# Altium PCB PCB1.PcbDoc
Units mm, origin at the board's own origin, x right, y up, seen from the top; angles counter-clockwise.
Board outline 152.4 x 101.6 mm, 2 copper layers (Top Layer, Bottom Layer); 37 components, 32 nets, 130 pads, 0 vias.
Unrouted connection lines stored in the file: 92.
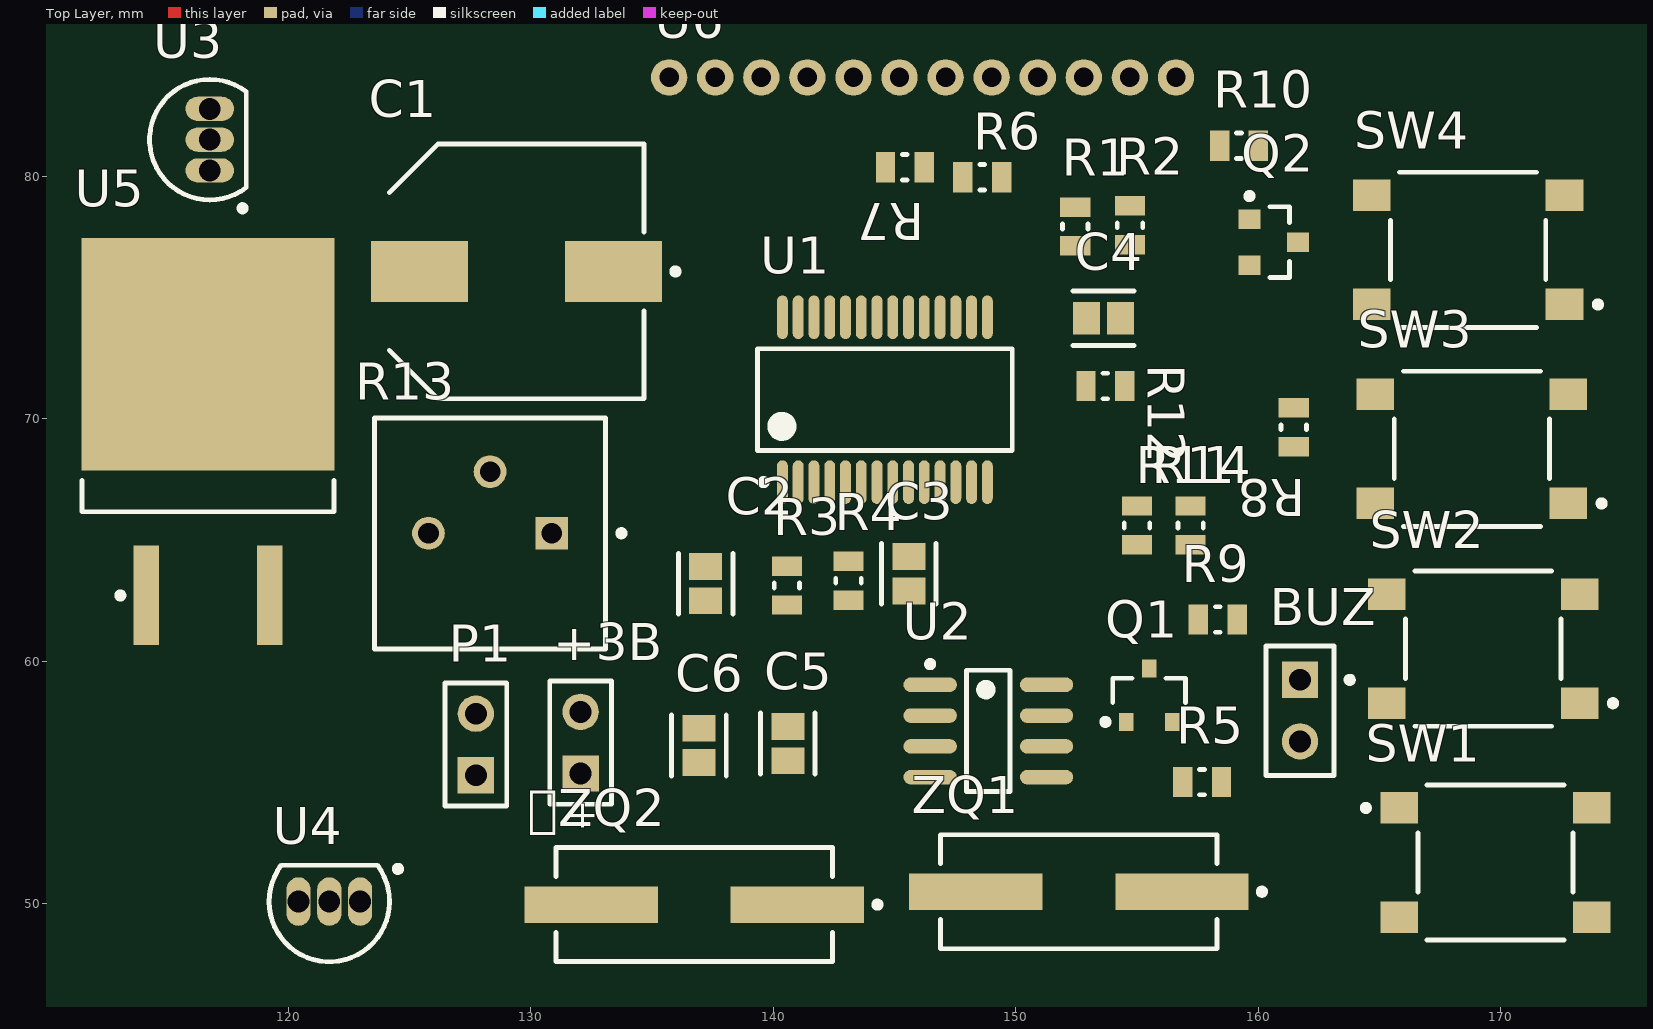
[diagram p0: Top Layer view]
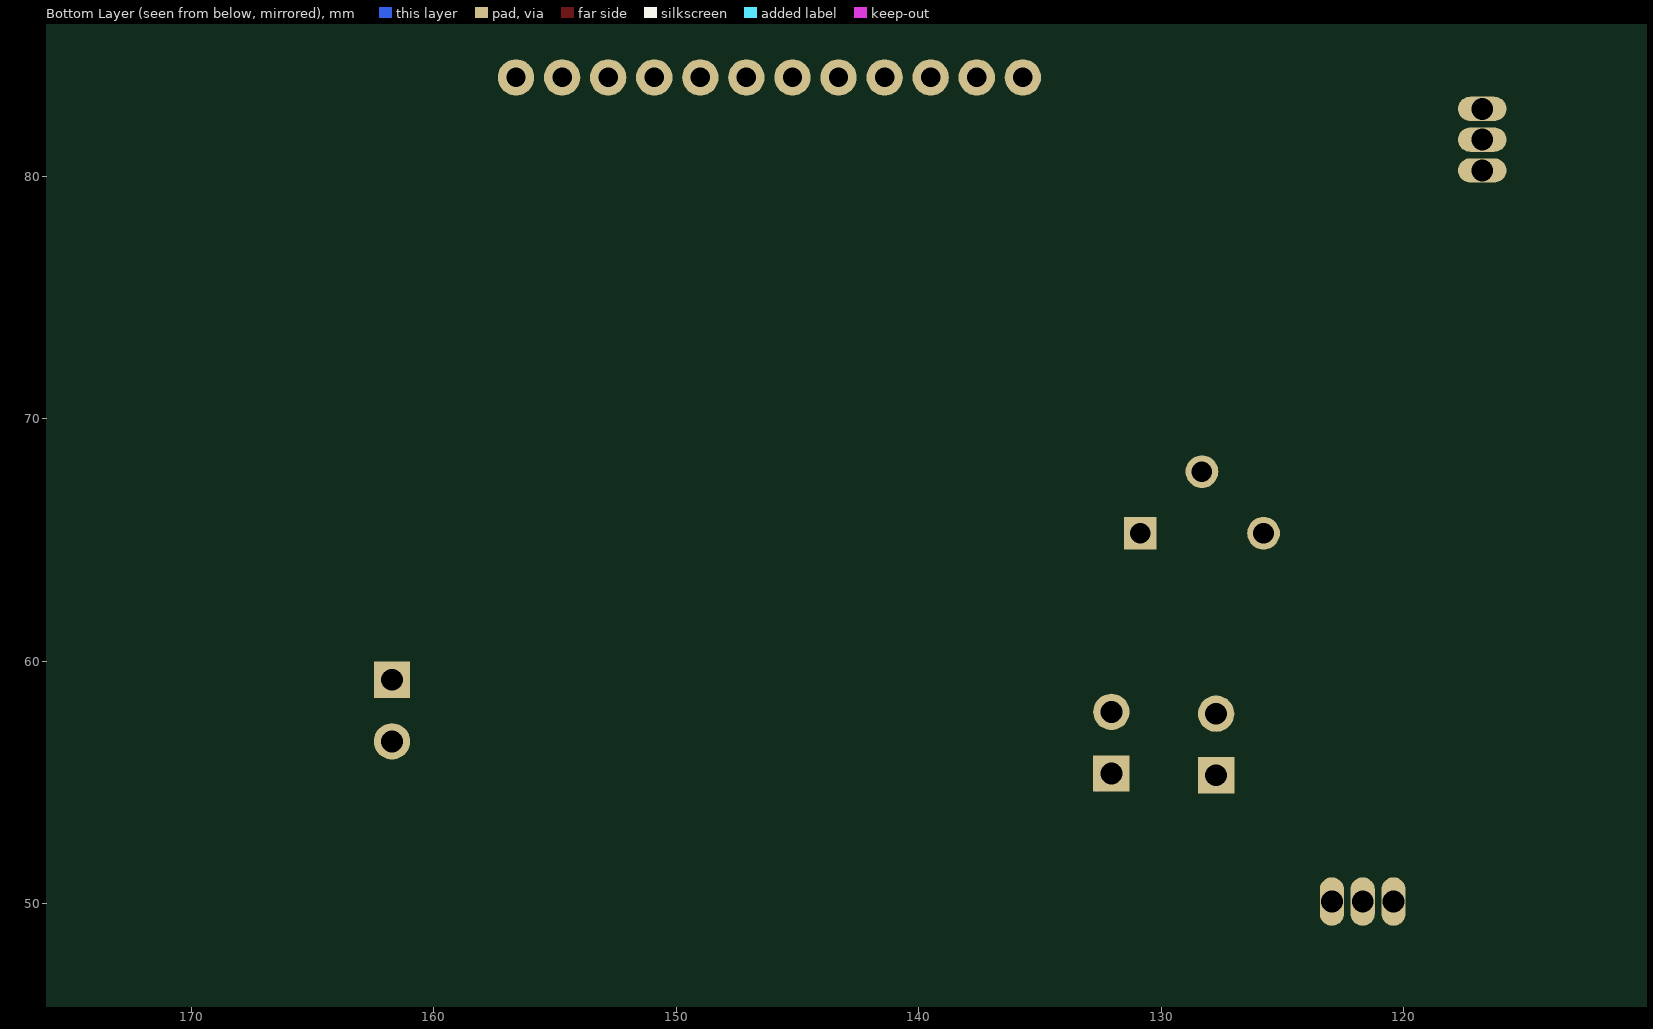
[diagram p1: Bottom Layer view, seen from below]

## Layer stack, top to bottom
Top Solder: solder mask 0.0102, Solder Resist, Dk 3.5
Top Layer: signal copper 0.0356
Dielectric 1: dielectric 0.32, FR-4, Dk 4.8
Bottom Layer: signal copper 0.0356
Bottom Solder: solder mask 0.0102, Solder Resist, Dk 3.5

## Board outline
25.4,25.4 177.8,25.4 177.8,127 25.4,127

## Design rules (kind name [scope] priority, off if disabled: settings)
Clearance [All] p1: gap=0.1 ignorepadtopadclearanceinfootprint=FALSE
PolygonConnect [All] p1: connectstyle=Relief reliefconductorwidth=0.254 reliefentries=4 polygonreliefangle="90 Angle" airgapwidth=0.254
RoutingVias [All] p1: holewidth=0.711 width=1.27 viastyle="Through Hole" minholewidth=0.711 minwidth=1.27 maxholewidth=0.711 maxwidth=1.27
SolderMaskExpansion [All] p1: expansion=0.102 istentingtop=FALSE
Width [All] p1: maxlimit=3 minlimit=0.1 preferedwidth=0.3 minimp=50.000000 maximp=50.000000 favimp=50.000000
30 further rules are at their usual default settings.

## Components (designator, comment, footprint, x,y, rotation, side; value= is the part's Value field where it differs from the comment)
ZQ2 "32.762khz" CFM-HCM49-2_V 136.745,49.962 r180 top (schematic designator ZQ2)
+3B "Battery" BAT-2 132.055,56.642 r90 top
BUZ "Speaker" PIN2 161.722,59.233 r270 top
C1 "UUX0J471MNL1GS" FP-UUX0J471MNL1GS-MFG 129.413,76.073 r180 top
C2 "1uF" FP-0805-L_2_01_0_2-W_1_25-IPC_C 137.211,63.195 r270 top
C3 "100nF" FP-0805-L_2_01_0_2-W_1_25-IPC_C 145.593,63.607 r90 top
C4 "100nF" FP-0805-L_2_01_0_2-W_1_25-IPC_C 153.619,74.143 r0 top
C5 "27nF" FP-0805-L_2_01_0_2-W_1_25-IPC_C 140.6,56.6 r90 top
C6 "27pF" FP-0805-L_2_01_0_2-W_1_25-IPC_C 136.934,56.526 r90 top
P1 "Header 2" HDR1X2 127.737,55.296 r90 top
Q1 "BC857C" INF-SOT23_L 155.499,58.598 r90 top
Q2 "BC846BLT1G" ONSC-SOT-23-3-318-08_V 160.639,77.282 r0 top
R1 "4.7K" RESC2013X60X35LL10T20 152.451,77.927 r90 top
R2 "4.7K" RESC2013X60X35LL10T20 154.711,77.978 r90 top
R3 "4.7K" RESC2013X60X35LL10T20 140.564,63.119 r90 top
R4 "4.7K" RESC2013X60X35LL10T20 143.104,63.322 r90 top
R5 "4.7K" RESC2013X60X35LL10T20 157.683,55.016 r180 top
R6 "4.7K" RESC2013X60X35LL10T20 148.615,79.959 r0 top
R7 "4.7K" RESC2013X60X35LL10T20 145.428,80.366 r180 top
R8 "1K" RESC2013X60X35LL10T20 161.468,69.647 r270 top
R9 "1K" RESC2013X60X35LL10T20 158.331,61.722 r180 top
R10 "1K" RESC2013X60X35LL10T20 159.207,81.255 r180 top
R11 "4.7K" RESC2013X60X35LL10T20 157.209,65.6 r90 top
R12 "4.7K" RESC2013X60X35LL10T20 153.695,71.349 r0 top
R13 "4.7K" BOUR-3386P 128.321,66.548 r180 top
R14 "4.7K" RESC2013X60X35LL10T20 155,65.6 r90 top
SW1 "430152070826" FP-430152070826-MFG 169.786,51.7 r0 top
SW2 "430152070826" FP-430152070826-MFG 169.278,60.518 r180 top
SW3 "430152070826" FP-430152070826-MFG 168.808,68.758 r180 top
SW4 "430152070826" FP-430152070826-MFG 168.656,76.962 r180 top
U1 "PIC16F876A-I/SS" SSOP-SS28_L 144.603,70.786 r90 top
U2 "DS1307ZN+T&R" S8+2_N 148.869,57.125 r0 top
U3 "DS18B20+" Q3+1 116.764,81.509 r0 top
U4 "DS18B20+" Q3+1 121.691,50.089 r90 top
U5 "L7805CD2T-TR" TO-263_M 116.688,69.063 r90 top
U6 "lcd" PCBComponent_1 156.607,84.074 r180 top
ZQ1 "4Mhz" CFM-HCM49-2_V 152.603,50.495 r180 top

## Footprints (in the part's own frame and the unit in brackets; to place one, negate y for a bottom-side part, rotate by r counter-clockwise, add the part's x,y. Pads: shape width x height; smd on the part's side, far side on the other; paste and mask are expansions set on the pad)
BAT-2 [mm] "Battery; 2 Leads"
  rect 1.5x1.5 hole 0.9: 1(-1.27,0)
  round 1.5 hole 0.9: 2(1.27,0)
  silkscreen extent -2.54,-1.27 2.54,1.27
BOUR-3386P [mm] "THD, 3-Leads, Body 9.53x9.53mm, Pitch 2.54mm"
  rect 1.35x1.35 hole 0.85: 1(-2.54,1.27)
  round 1.35 hole 0.85: 2(0,-1.27) 3(2.54,1.27)
  silkscreen extent -5.54,-3.48 4.77,6.05, body extent -4.79,-3.52 4.79,6.06, height 4.95
CFM-HCM49-2_V [mm] "SMD, 2-Leads, Body 11.4x4.7mm, Pitch 8.5mm"
  rect 5.5x1.5 smd: 1(-4.25,0) 2(4.25,0)
  silkscreen extent -7.68,-2.35 5.7,2.35, body extent -5.7,-2.35 5.7,2.35, height 4.3
FP-0805-L_2_01_0_2-W_1_25-IPC_C [mm]
  rect 1.105x1.356 smd paste+0 mask+0: 1(-0.706,0) 2(0.706,0)
  silkscreen extent -1.26,-1.12 1.26,1.13, body extent -1.36,-0.82 1.36,0.82, height 0.25
FP-430152070826-MFG [mm]
  rect 1.55x1.3 smd paste+0 mask+0: 1(-3.975,2.25) 2(-3.975,-2.25) 3(3.975,2.25) 4(3.975,-2.25)
  silkscreen extent -5.47,-3.2 3.2,3.2, body extent -4.85,-3.3 4.85,3.3, height 0.25
FP-UUX0J471MNL1GS-MFG [mm]
  rect 4x2.5 smd paste+0 mask+0: 1(-4,0) 2(4,0)
  silkscreen extent -6.68,-5.25 5.25,5.25, body extent -6.25,-5.5 6.25,5.5, height 0.25
HDR1X2 [mm] "Connector; Header; 2 Position"
  rect 1.5x1.5 hole 0.9: 1(0,0)
  round 1.5 hole 0.9: 2(2.54,0)
  silkscreen extent -1.27,-1.27 3.81,1.27
INF-SOT23_L [mm] "SOT23, 3-Leads, Body 2.9x1.3 mm, Pitch 0.95 mm, IPC High Density"
  rect 0.75x0.6 smd: 1(-1.1,0.95) 2(-1.1,-0.95) 3(1.1,0)
  silkscreen extent -1.22,-1.5 0.7,1.92, body extent -0.7,-1.5 0.7,1.5, height 1.1
ONSC-SOT-23-3-318-08_V [mm] "SOT23, 3-Leads, Body 2.92x1.3mm, Pitch 0.95mm"
  rect 0.9x0.8 smd: 1(-1,0.95) 2(-1,-0.95) 3(1,0)
  silkscreen extent -1.12,-1.46 0.65,2.02, body extent -0.65,-1.46 0.65,1.46, height 1.11
PCBComponent_1 [mm]
  round 1.5 hole 0.8: 1(0,0) 2(1.9,0) 3(3.8,0) 4(5.7,0) 5(7.6,0) 6(9.5,0) 7(11.4,0) 8(13.3,0) 9(15.2,0) 10(17.1,0) 11(19,0) 12(20.9,0)
PIN2 [mm] "Photosensitive Diode; 2 Leads"
  rect 1.5x1.5 hole 0.9: 1(0,0)
  round 1.5 hole 0.9: 2(2.54,0)
  silkscreen extent -1.4,-1.4 3.94,2.18
Q3+1 [mm] "TO, Flat Index; 3 In-Line, Axial Leads; Body Dia. 4.7mm; Leads 0.56 x 0.51 mm (max)"
  oval 2x1 hole 0.9: 1(0,-1.27) 2(0,0) 3(0,1.27)
  silkscreen extent -2.48,-2.95 1.5,2.48, body extent -2.48,-2.5 1.5,2.5, height 4.96
RESC2013X60X35LL10T20 [mm] "Chip Resistor, 2-Leads, Body 2.00x1.25mm, IPC High Density"
  rect 0.8x1.25 smd: 1(-0.8,0) 2(0.8,0)
  silkscreen extent -0.1,-0.52 0.1,0.53, body extent -1.05,-0.67 1.05,0.67, height 0.6
S8+2_N [mm] "SOIC, 8-Leads, Body 4.9x3.9mm, Pitch 1.27mm, IPC Medium Density"
  oval 2.2x0.6 smd: 1(-2.4,1.905) 2(-2.4,0.635) 3(-2.4,-0.635) 4(-2.4,-1.905) 5(2.4,-1.905) 6(2.4,-0.635) 7(2.4,0.635) 8(2.4,1.905)
  silkscreen extent -2.52,-2.5 0.9,2.88, body extent -2,-2.5 2,2.5, height 1.75
SSOP-SS28_L [mm] "SOP, 28-Leads, Body 10.2x5.2mm, Pitch 0.65mm, IPC High Density"
  oval 1.8x0.45 smd: 1(-3.4,4.225) 2(-3.4,3.575) 3(-3.4,2.925) 4(-3.4,2.275) 5(-3.4,1.625) 6(-3.4,0.975) 7(-3.4,0.325) 8(-3.4,-0.325) 9(-3.4,-0.975) 10(-3.4,-1.625) 11(-3.4,-2.275) 12(-3.4,-2.925) 13(-3.4,-3.575) 14(-3.4,-4.225) 15(3.4,-4.225) 16(3.4,-3.575) 17(3.4,-2.925) 18(3.4,-2.275) 19(3.4,-1.625) 20(3.4,-0.975) 21(3.4,-0.325) 22(3.4,0.325) 23(3.4,0.975) 24(3.4,1.625) 25(3.4,2.275) 26(3.4,2.925) 27(3.4,3.575) 28(3.4,4.225)
  silkscreen extent -3.52,-5.25 2.1,5.25, body extent -2.8,-5.25 2.8,5.25, height 2
TO-263_M [mm] "D2-PAK, 4-Leads, Body 9.2x10.2mm, Pitch 2.54mm, Lead Span 15.4mm, IPC Low Density"
  rect 4.1x1.05 smd: 1(-6.35,2.54) 3(-6.35,-2.54)
  rect 9.6x10.45 smd: 4(3.6,0)
  silkscreen extent -6.47,-5.2 -1.6,5.2, body extent -2.9,-5.2 6.45,5.2, height 4.6

## Part data
ZQ2 ZQ1: library part CMP-1215-00001-1, "At-Cut Crystal Unit, 3.5 to 30 MHz, -40 to 85 degC, 2-Pin 11.4Ã—4.7Ã—4.3 mm SMD, RoHS, Reel", Manufacturer="Citizen Finetech Miyota", Operating Temperature="-40 to 85 degC", PartNumber=HCM49-8.000MABJ-UT, C0="7 pF Max.", ComponentLink1Description="Manufacturer URL", ComponentLink1URL=http://cfm.citizen.co.jp/english/index.html, ComponentLink2Description=Datasheet, ComponentLink2URL=http://cfm.citizen.co.jp/english/product/pdf/HCM49.pdf, ComponentLink3Description="Package Specification", ComponentLink3URL=http://cfm.citizen.co.jp/english/product/pdf/HCM49.pdf, DatasheetVersion=Jan-12, DL="100 uW", f0="3.5 to 30 MHz", IR="500 MOhm Min.", Mounting Technology="Surface Mount", PackageDescription="2-Pin Surface Mount, Body 11.4 x 4.7 mm, Pitch 8.5 mm", Packing=Reel, R1="50 to 200 Ohm", RoHS=TRUE
+3B: "Multicell Battery", LatestRevisionDate=17-Jul-2002, LatestRevisionNote="Re-released for DXP Platform.", PackageDescription="Battery; 2 Leads", PackageReference=BAT-2, Published=24-Mar-1999, Publisher="Altium Limited"
BUZ: "Loudspeaker", LatestRevisionDate=17-Jul-2002, LatestRevisionNote="Re-released for DXP Platform.", PackageReference=PIN2, Published=24-Mar-1999, Publisher="Altium Limited"
C1: library part CMP-12462-000017-1, "CAP ALUM 470UF 20% 6.3V SMD", Capacitance=470uF, Case/Package=Radial, Leakage Current=88.83uA, Max Operating Temperature=105°C, Min Operating Temperature=-55°C, Package Quantity=1, Ripple Current=340mA, Tolerance=20%, Voltage Rating=6.3V, Diameter=10mm, Features="General Purpose", Height=10mm, Height - Seated (Max)=0.394inch, Length=10mm, Life (Hours)=2000Hour, Mount="Surface Mount", Packaging="Tape and Reel", Radiation Hardening=No, Termination=SMD/SMT, Voltage Rating (DC)=6.3V
C2 C3 C4 C5 C6: library part CMP-04427-006442-1, "Automotive Ceramic Capacitor, 0805, 1nF, 5%, X7R, 0.15, 50V", Capacitance=1nF, Case Code (Imperial)=0805, Case Code (Metric)=2012, Dielectric=X7R, Max Operating Temperature=125°C, Min Operating Temperature=-55°C, Package Quantity=8000, Ratings=AEC-Q200, Tolerance=5%, Voltage Rating=50V, Case/Package=0805, Construction=Flat, Depth=1.25mm, Length=2.01mm, Mount="Surface Mount", Number of Pins=2, Packaging="Tape and Reel", Radiation Hardening=No, RoHS Compliant=Yes, Termination=SMD/SMT, Thickness=0.037inch, Voltage Rating (DC)=50V, Width=0.049inch
P1: "Header, 2-Pin", LatestRevisionDate=17-Jul-2002, LatestRevisionNote="Re-released for DXP Platform.", Publisher="Altium Limited"
Q1: library part CMP-1177-00039-1, "PNP Silicon AF Transistor, 45 V VCEO, 100 mA IC, SOT23, Reel, Green", Manufacturer=Infineon, ComponentLink1Description="Manufacturer URL", ComponentLink1URL=http://www.infineon.com/, ComponentLink2Description=Datasheet, ComponentLink2URL=http://www.infineon.com/dgdl/bc857series_bc858series_bc859series_bc860series.pdf?folderId=db3a304314dca389011541d30fa21656&fileId=db3a304314dca389011541da0e3a1661, ComponentLink3Description="Package Specification", ComponentLink3URL=http://www.infineon.com/dgdl/SOT23-Package_Overview.pdf?folderId=db3a30431936bc4b0119532290053c66&fileId=db3a30431936bc4b0119533468123c85, fT (typ)="250Â MHz", Green=TRUE, IBM (max)="200Â mA", IC (max)="100Â mA", ICBO (max)="15Â nA", ICM (max)="200Â mA", Mounting Technology="Surface Mount", PackageDescription="3-Pin Small Outline Transistor Package, 1.3 x 2.9 mm Body, 0.95 mm Pitch", PackageReference=SOT23, PackageVersion=Apr-08, Packing=Reel, PartNumber=BC857C, Polarity=PNP, Ptot (max)="330Â mW", VCBO (max)="50Â V", VCEO (max)="45Â V", VEBO (max)="5Â V"
Q2: library part CMP-1048-00779-1, "General Purpose Transistor, NPN Silicon, 3-Pin SOT-23, Pb-Free, Tape and Reel", Manufacturer="On Semiconductor", ComponentLink1Description="Manufacturer URL", ComponentLink1URL=http://www.onsemi.com/, ComponentLink2Description=Datasheet, ComponentLink2URL=http://www.onsemi.cn/pub_link/Collateral/BC846ALT1-D.PDF, ComponentLink3Description="Package Specification", ComponentLink3URL=http://www.onsemi.cn/pub_link/Collateral/318-08.PDF, DatasheetVersion="Rev. 11", fT Min (MHz)=100, IC Continuous (A)=0.1, Mounting Technology="Surface Mount", PackageDescription="3-Pin Small Outline Transistor, Body 2.92 x 1.3 mm, Pitch 0.95 mm", PackageReference=SOT-23-3-318-08, PackageVersion="Rev. AP, 11/2009", Packing="Tape and Reel", PartNumber=BC846BLT1G, Polarity=NPN, RoHS=TRUE
R1 R2 R3 R4 R5 R6 R7 R8 R9 R10 R11 R12 R14: library part CMP-1013-00411-2, Manufacturer=Yageo, Part Number=RC0805FR-07137RL
R13: library part CMP-2000-05592-1, "Square Trimpot(R) Trimming Potentiometer, 100 KOhm, +/- 10%, 0.5 W, -55 to 125 degC, 3-Pin THD, RoHS, Tube", Manufacturer=Bourns, Manufacturer Series=3386, Maximum Operating Temperature=125C, Minimum Operating Temperature=-55C, Operating Temperature-Max (Cel)=125, Operating Temperature-Min (Cel)=-55, Package=RectangularPackage, Package Description="3-Pin Through Hole Device, Body 9.53 x 9.53 mm, Pitch 2.54 mm", Package Reference=3386P, Power Rating=1/2W, Rated Power Dissipation (P) (W)=0.5, Rated Temperature (Cel)=85, Resistance (ohm)=100000, Resistance Law=Linear, Resistance Value=100KOhm, Resistive Element Material=Cermet, Temperature Coefficient=100ppm/C, Tolerance=10%, Tolerance (%)=10, Actuator Orientation=Vertical, Actuator Type=Screw, Datasheet URL=http://www.bourns.com/docs/Product-Datasheets/3386.pdf, Datasheet Version=05/2016, Family=3386, Lead Free=NO, Manufacturer URL=http://www.bourns.com/, Mounting=ThroughHole, Mounting Feature=ThroughHole, Mounting Technology=ThroughHole, Number of Terminals=3, Number of Turns=1, Packaging=Tube, Product Depth=9.53mm, Product Height=4.83mm, Product Length=9.53mm, Product Type=Potentiometer, Shaft Diameter=3.15mm, Technology=Cermet, Terminal Finish=TINLEAD, Terminal Shape=WIRE, Termination Style=Pin, Type=Trimmer
SW1 SW2 SW3 SW4: library part CMP-1452-00005-2, "SWITCH TACTILE SPST-NO 0.05A 12V", Contact Current Rating=50mA, Max Operating Temperature=85°C, Min Operating Temperature=-40°C, Operating Force=260gf, Actuator Length=3.6mm, Actuator Material=Polymer, Actuator Type=Standard, Contact Material="Stainless Steel", Contact Type="1 maker", Current Rating=50mA, Height=7mm, Illumination Type=Non-Illuminated, Length=6.2mm, Mechanical Life=200000Cycles, Mount="Surface Mount", Packaging="Cut Tape", REACH SVHC="No SVHC", RoHS Compliant=Yes, Series=WS-TASV, Switch Function=Off-Mom, Switch Travel=0.25mm, Termination="Gull Wing", Throw Configuration=SPST, Width=6.2mm
U1: library part CMP-0115-01331-1, "Enhanced FLASH Microcontroller, 8K (x14-Bit words) FLASH, 368 Bytes RAM, 28-Pin SSOP, Standard VDD Range, Industrial Temperature", Code_JEDEC=MS-150, ComponentAvailability="Unknown. Contact manufacturer to determine status.", DatasheetVersion="revB, Oct-2003", PackageDescription="28-Lead Plastic Shrink Small Outline (SS) - 5.3mm Body [SSOP]", PackageReference=SSOP-SS28, PackageVersion="revBB, Aug-2009"
U2: library part CMP-0254-00344-1, "64 x 8, Serial, I2C Real-Time Clock, 5.0V, 8-Pin SO, -40 to 85 degC, Pb-Free, Reel", Code_IPC=SOIC127P600-8, Code_JEDEC=MS-012-AA, ComponentLink1Description="Manufacturer URL", ComponentLink1URL=http://www.maxim-ic.com, ComponentLink2Description=Datasheet, ComponentLink2URL=http://datasheets.maxim-ic.com/en/ds/DS1307.pdf, ComponentLink3Description="Package Specification", ComponentLink3URL=http://pdfserv.maxim-ic.com/package_dwgs/21-0041.PDF, DatasheetVersion=10-Feb-2008, PackageDescription="8-Pin Small-Outline IC, Narrow (0.15in), 1.27 mm Pitch, SOIC (N), Pb-Free", PackageReference=S8+2, PackageVersion="revC, 2010"
U3 U4: library part CMP-0253-00003-1, "Programmable Resolution Digital Thermometer, 1-Wire Interface, ±0.5°C Accuracy, 3-Pin TO92, -55°C to +125°C, Pb-Free", Code_JEDEC=TO-226-AA, ComponentLink1Description="Manufacturer URL", ComponentLink1URL=http://www.maxim-ic.com, ComponentLink2Description=Datasheet, ComponentLink2URL=http://datasheets.maxim-ic.com/en/ds/DS18B20.pdf, DatasheetVersion=2007, PackageDescription="TO-92 Package, Body Dia. 4.7mm; Leads 0.51 x 0.51 mm (max), Pb-Free", PackageReference=Q3+1, PackageVersion="revB, 2009"
U5: library part CMP-0244-00213-1, "Positive Voltage Regulator, 3-Pin D2PAK, Tape and Reel", ComponentLink1Description="Manufacturer URL", ComponentLink1URL=http://www.st.com, ComponentLink2Description=Datasheet, ComponentLink2URL=http://www.st.com/internet/com/TECHNICAL_RESOURCES/TECHNICAL_LITERATURE/DATASHEET/CD00000444.pdf, DatasheetVersion=16/11/2011, PackageDescription="3-Pin Transistor Outline Package 2.54 mm Pitch, 15.4 mm Lead Span (D2PAK)", PackageReference=TO-263, PackageVersion=2011

## Nets (pads, with @x,y where several pads share a name; then routed paths per layer and width w, separated by ;. In a path a pad name is that pad's centre, name@x,y a point inside that pad or via, vN(x,y) a via of type N, cw(c..) or ccw(c..) an arc to the next point about the centre after c; other vN are vias at no path point)
+5B: BUZ.2 C3.1 C4.1 R1.1 R2.1 R3.1 R4.1 R5.1 R6.1 R7.1 R8.2 R11.2 R12.2 R13.3 R14.2 U1.20 U2.8 U3.3 U4.3 U5.3 U6.1
+12B: C1.2 P1.2 U5.1
GND: +3B.1 C1.1 C2.2 C3.2 C4.2 C5.2 C6.2 P1.1 Q1.2 R13.1 SW1.1 SW1.3 SW2.1 SW2.3 SW3.1 SW3.3 SW4.1 SW4.3 U1.8 U1.19 U2.4 U3.1 U4.1 U5.4 U6.3 U6.4 U6.5 | length 0.8
  Bottom Layer w0.3: +3B.1 +3B.1@132.655,54.772
"lcd 4": U1.23 U6.6
"lcd 6": U1.24 U6.7
"lcd 11": U1.25 U6.8
"lcd 12": U1.26 U6.9
"lcd 13": U1.27 U6.10
"lcd 14": U1.28 U6.11
mclr: C2.1 R3.2 U1.1
NetZQ2_1: ZQ2.1 U2.2
NetZQ2_2: ZQ2.2 U2.1
Net+3B_2: +3B.2 U2.3
NetBUZ_1: BUZ.1 Q1.3
NetC5_1: C5.1 U1.9 ZQ1.1
NetC6_1: C6.1 U1.10 ZQ1.2
NetQ1_1: Q1.1 R9.1
NetQ2_1: Q2.1 R10.1
NetQ2_2: Q2.2 U6.12
NetQ2_3: Q2.3 R8.1
NetR1_2: R1.2 SW1.2 SW1.4 U1.16
NetR2_2: R2.2 SW2.2 SW2.4 U1.17
NetR4_2: R4.2 U1.4 U3.2
NetR5_2: R5.2 U1.3 U4.2
NetR6_2: R6.2 SW3.2 SW3.4 U1.21
NetR7_2: R7.2 SW4.2 SW4.4 U1.22
NetR9_2: R9.2 U1.11
NetR10_2: R10.2 U1.18
NetR11_1: R11.1 U2.7
NetR12_1: R12.1 U1.15 U2.5
NetR13_2: R13.2 U6.2
NetR14_1: R14.1 U1.14 U2.6
pads on no net: U1.2 U1.5 U1.6 U1.7 U1.12 U1.13

## Text inside footprints (layer, text, board x,y; h text height)
+3B: Top Overlay "+" at 132.632,52.972 h1.15 r90